# Altium PCB PCB1.PcbDoc
Units mil, origin at the board's own origin, x right, y up, seen from the top; angles counter-clockwise.
Board outline 2020.03 x 2260.03 mil, 2 copper layers (Top Layer, Bottom Layer); 4 components, 4 nets, 45 pads, 0 vias.
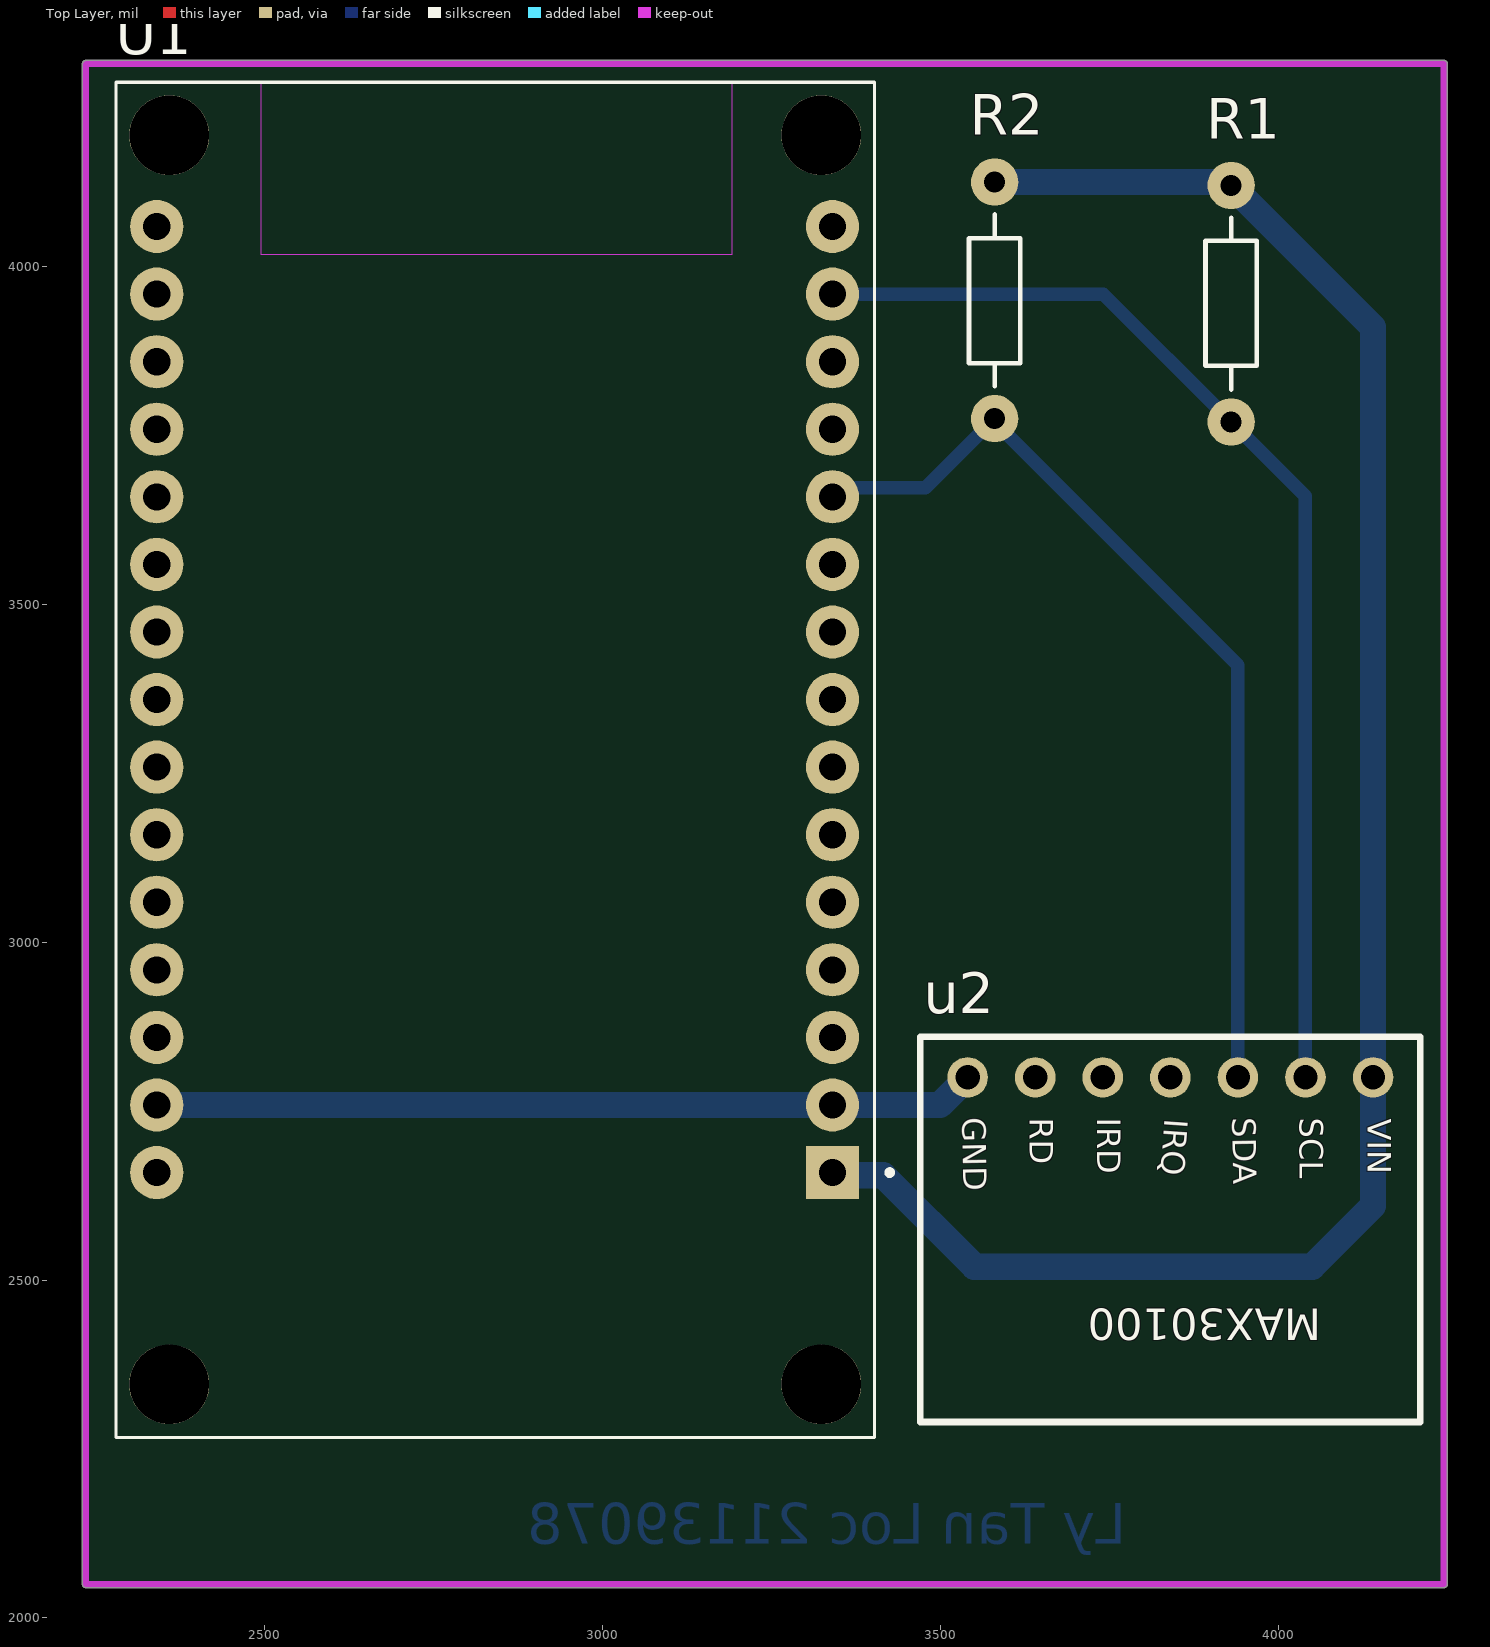
[diagram p0: Top Layer view]
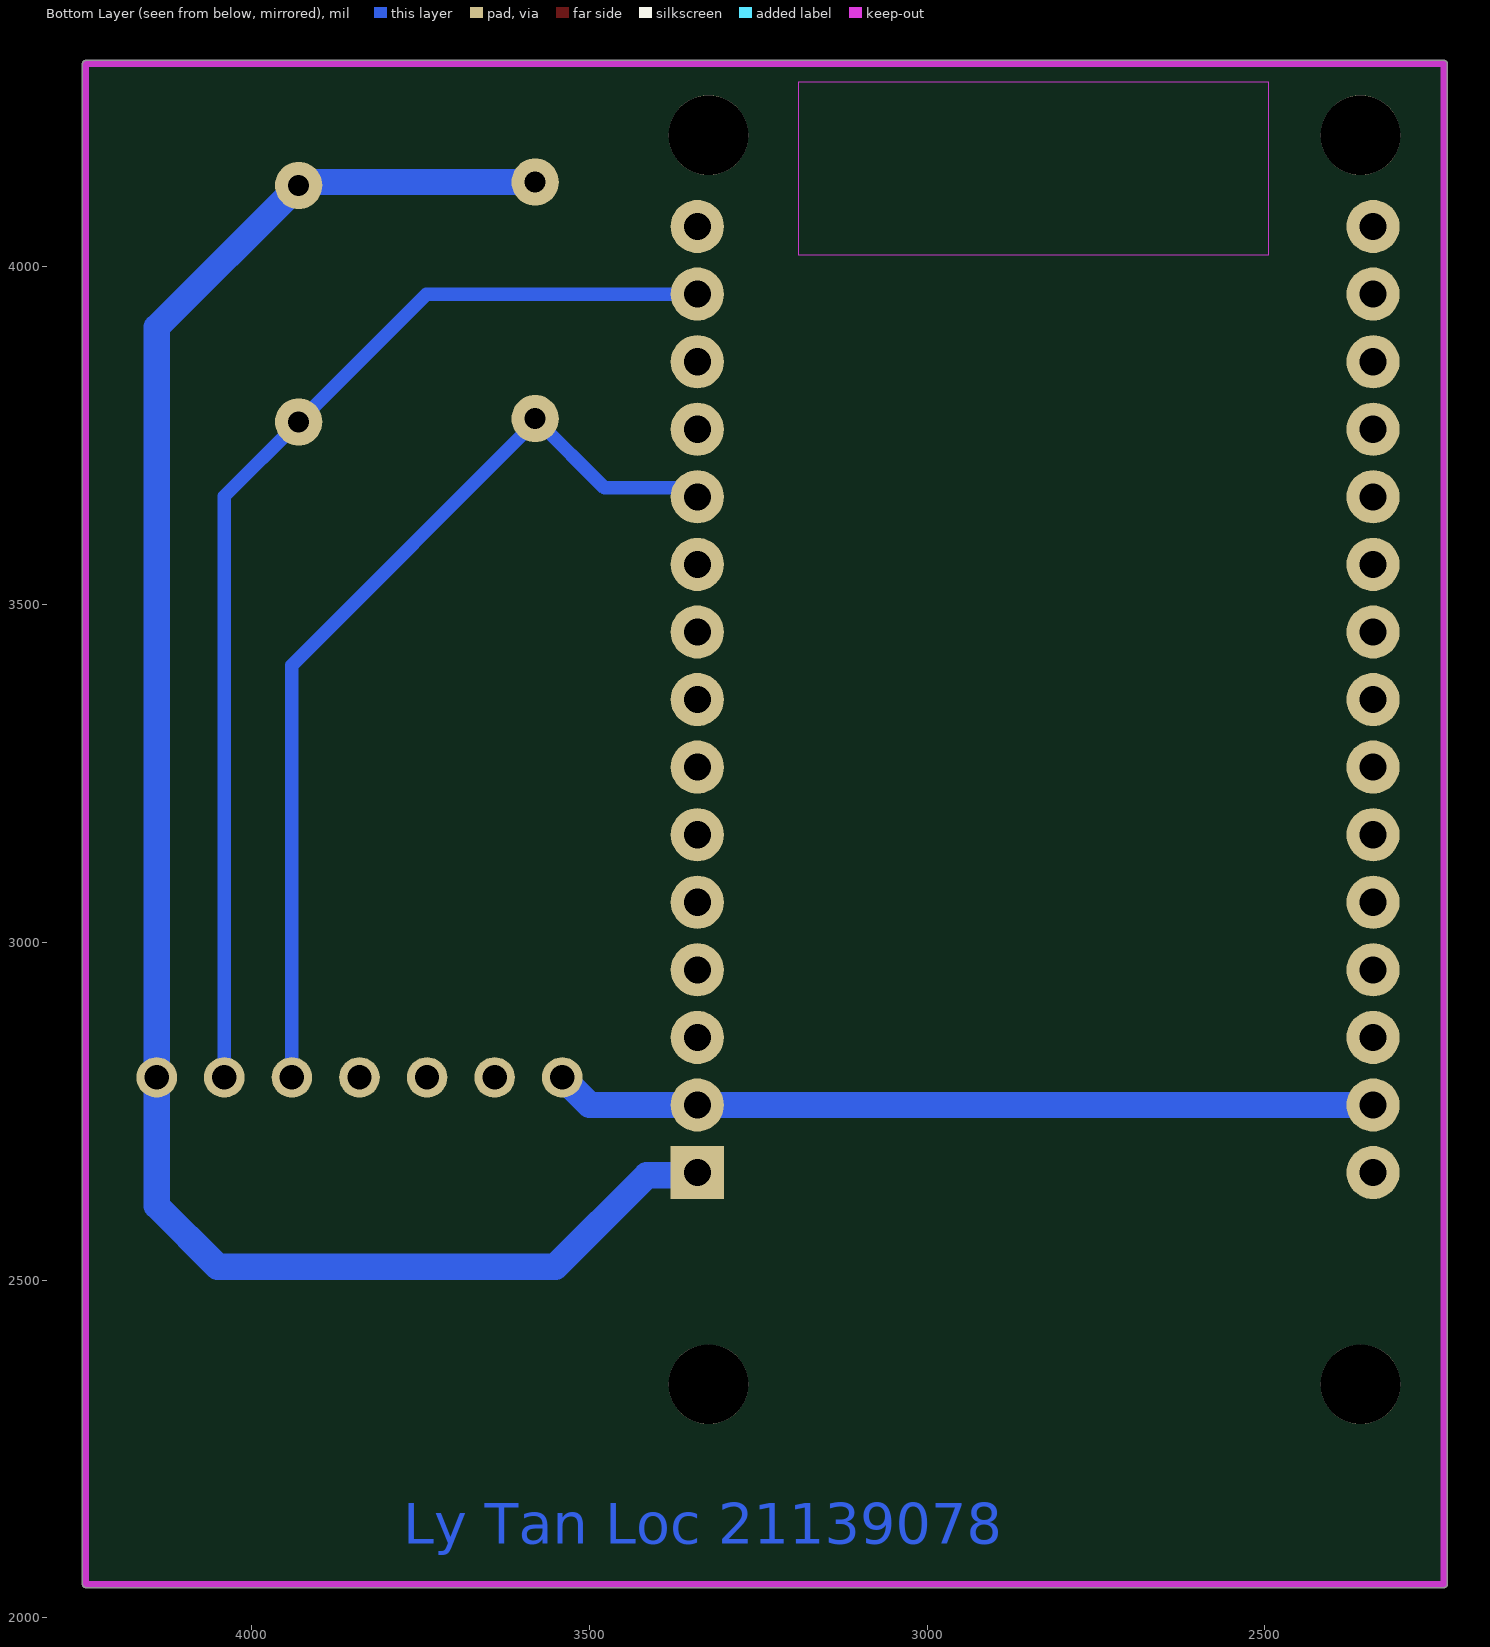
[diagram p1: Bottom Layer view, seen from below]

## Layer stack, top to bottom
Top Solder: solder mask 0.4, Solder Resist, Dk 3.5
Top Layer: signal copper 1.4
Dielectric 1: dielectric 12.6, FR-4, Dk 4.8
Bottom Layer: signal copper 1.4
Bottom Solder: solder mask 0.4, Solder Resist, Dk 3.5

## Board outline
2229.99,2050 2229.98,4300 cw(c2235,4300) 2235,4305.02 4245,4305.02 cw(c4245,4300) 4250.01,4300 4250.02,2050 cw(c4245,2050) 4245,2044.98 2235,2044.98 cw(c2235,2050)

## Design rules (kind name [scope] priority, off if disabled: settings)
Clearance [All] p1: gap=10 ignorepadtopadclearanceinfootprint=FALSE except(0: Arc-Hole Track-Hole SMDPad-Hole THPad-Hole Via-Hole Fill-Hole Poly-Hole Region-Hole Text-Hole)
PolygonConnect [All] p1: connectstyle=Relief reliefconductorwidth=10 reliefentries=4 polygonreliefangle="90 Angle" airgapwidth=10
RoutingVias [All] p1: holewidth=28 width=50 viastyle="Through Hole" minholewidth=28 minwidth=50 maxholewidth=28 maxwidth=50
SolderMaskExpansion [All] p1: expansion=4 istentingtop=FALSE
Width Width_1 [Not All] p1: maxlimit=35 minlimit=35 preferedwidth=35
30 further rules are at their usual default settings.

## Components (designator, comment, footprint, x,y, rotation, side; value= is the part's Value field where it differs from the comment)
R1 "Res1" R1/4W 3930,3770 r90 top value=4.7k
R2 "Res1" R1/4W 3580,4125 r270 top value=4.7k
U1 "ESP32-DEVKIT-V1" MODULE_ESP32_DEVKIT_V1 2840,3270 r180 top
u2 "MAX30100" MAX30100_MODULE 3840,2575 r270 top

## Footprints (in the part's own frame and the unit in brackets; to place one, negate y for a bottom-side part, rotate by r counter-clockwise, add the part's x,y. Pads: shape width x height; smd on the part's side, far side on the other; paste and mask are expansions set on the pad)
MAX30100_MODULE [mil]
  round 60 hole 36 paste-99999 mask+4: 1(-225,300) 2(-225,200) 3(-225,100) 4(-225,0) 5(-225,-100) 6(-225,-200) 7(-225,-300)
  silkscreen extent -285,-370 285,370
MODULE_ESP32_DEVKIT_V1 [mm]
  rect 2x2 / inner round 2 / far side rect 2x2 hole 1.02: 1(-12.7,15.515)
  round 2 hole 1.02: 2(-12.7,12.975) 3(-12.7,10.435) 4(-12.7,7.895) 5(-12.7,5.355) 6(-12.7,2.815) 7(-12.7,0.275) 8(-12.7,-2.265) 9(-12.7,-4.805) 10(-12.7,-7.345) 11(-12.7,-9.885) 12(-12.7,-12.425) 13(-12.7,-14.965) 14(-12.7,-17.505) 15(-12.7,-20.045) 16(12.7,-20.045) 17(12.7,-17.505) 18(12.7,-14.965) 19(12.7,-12.425) 20(12.7,-9.885) 21(12.7,-7.345) 22(12.7,-4.805) 23(12.7,-2.265) 24(12.7,0.275) 25(12.7,2.815) 26(12.7,5.355) 27(12.7,7.895) 28(12.7,10.435) 29(12.7,12.975) 30(12.7,15.515)
  round 3 hole 3 unplated: ""(-12.28,23.475) ""(-12.28,-23.475) ""(12.23,23.475) ""(12.23,-23.475)
  Keep-Out Layer region: 8.78,-25.475 -8.91,-25.475 -8.91,-18.985 8.78,-18.985
  Keep-Out Layer region: 8.78,-25.475 -8.91,-25.475 -8.91,-18.985 8.78,-18.985
  silkscreen extent -14.95,-25.47 14.23,25.47
R1/4W [mil] "R 1/4W, 2 Pin, 350mil"
  round 70 hole 31: 1(0,0) 2(350,0)
  silkscreen extent 48,-38 302,38, body extent -40,-47 386,47, height 111

## Part data
R1 R2: library part Res1_1, "Resistor", Manufacturer="Generic Components", Class=Passive, Published=08/06/2000, Publisher="Altium Hobart Technology Centre", SubClass=Resistor
U1: "Dual core, Wi-Fi: 2.4 GHz up to 150 Mbits/s,BLE (Bluetooth Low Energy) and legacy Bluetooth, 32 bits, Up to 240 MHz", Package=None, Availability="Not in stock", Check_prices=https://www.snapeda.com/parts/ESP32-DEVKIT-V1/Do+it/view-part/?ref=eda, MF="Do it", MP=ESP32-DEVKIT-V1, Price=None, SnapEDA_Link=https://www.snapeda.com/parts/ESP32-DEVKIT-V1/Do+it/view-part/?ref=snap
u2: library part "MAX30100 MODULE COPY"

## Nets (pads, with @x,y where several pads share a name; then routed paths per layer and width w, separated by ;. In a path a pad name is that pad's centre, name@x,y a point inside that pad or via, vN(x,y) a via of type N, cw(c..) or ccw(c..) an arc to the next point about the centre after c; other vN are vias at no path point)
NetR1_1: R1.1 U1.14 u2.2 | length 1683.9
  Bottom Layer w20: U1.14 3740.83,3959.17 R1.1 4040,3660 u2.2
NetR1_2: R1.2 R2.1 U1.1 u2.1 | length 2851.1
  Bottom Layer w10: R2.1@3575,4130 R2.1 ; R1.2@3925,4125 R1.2
  Bottom Layer w39: U1.1 3344.2,2654.98 3415.02,2654.98 3550,2520 4050,2520 4140,2610 u2.1 4140,3910 R1.2 ; R2.1 R1.2@3925,4125
NetR2_2: R2.2 U1.11 u2.3 | length 1407.1
  Bottom Layer w10: U1.11 U1.11@3353.15,3672.33
  Bottom Layer w20: U1.11@3353.15,3672.33 3477.33,3672.33 3577.5,3772.5 3940,3410 u2.3
NetU1_2: U1.2 U1.29 u2.7 | length 1216.9
  Bottom Layer w39: U1.29 U1.2 3499.17,2759.17 u2.7
pads on no net: U1. U1.3 U1.4 U1.5 U1.6 U1.7 U1.8 U1.9 U1.10 U1.12 U1.13 U1.15 U1.16 U1.17 U1.18 U1.19 U1.20 U1.21 U1.22 U1.23 U1.24 U1.25 U1.26 U1.27 U1.28 U1.30 u2.4 u2.5 u2.6

## Keep-outs
Keep-Out Layer:
  lines w10: 2235,2050 2235,4300 4245,4300 4245,2050 2235,2050

## Other copper
Bottom Layer:
  text "Ly Tan Loc 21139078" at 3775,2109.99 h60

## Text inside footprints (layer, text, board x,y; h text height)
u2: Top Overlay "VIN" at 4120.4,2738.5 h59.05 r270; Top Overlay "SCL" at 4020,2740 h59.05 r270; Top Overlay "SDA" at 3920,2740 h59.05 r271; Top Overlay "IRQ" at 3820,2740 h59.05 r266; Top Overlay "IRD" at 3720,2740 h59.05 r270; Top Overlay "RD" at 3620,2740 h59.05 r270; Top Overlay "GND" at 3520,2740 h59.05 r271